# Altium PCB PCB1.PcbDoc
Units mm, origin at the board's own origin, x right, y up, seen from the top; angles counter-clockwise.
Board outline 134.47 x 82.85 mm, 2 copper layers (Top Layer, Bottom Layer); 55 components, 56 nets, 192 pads, 24 vias.
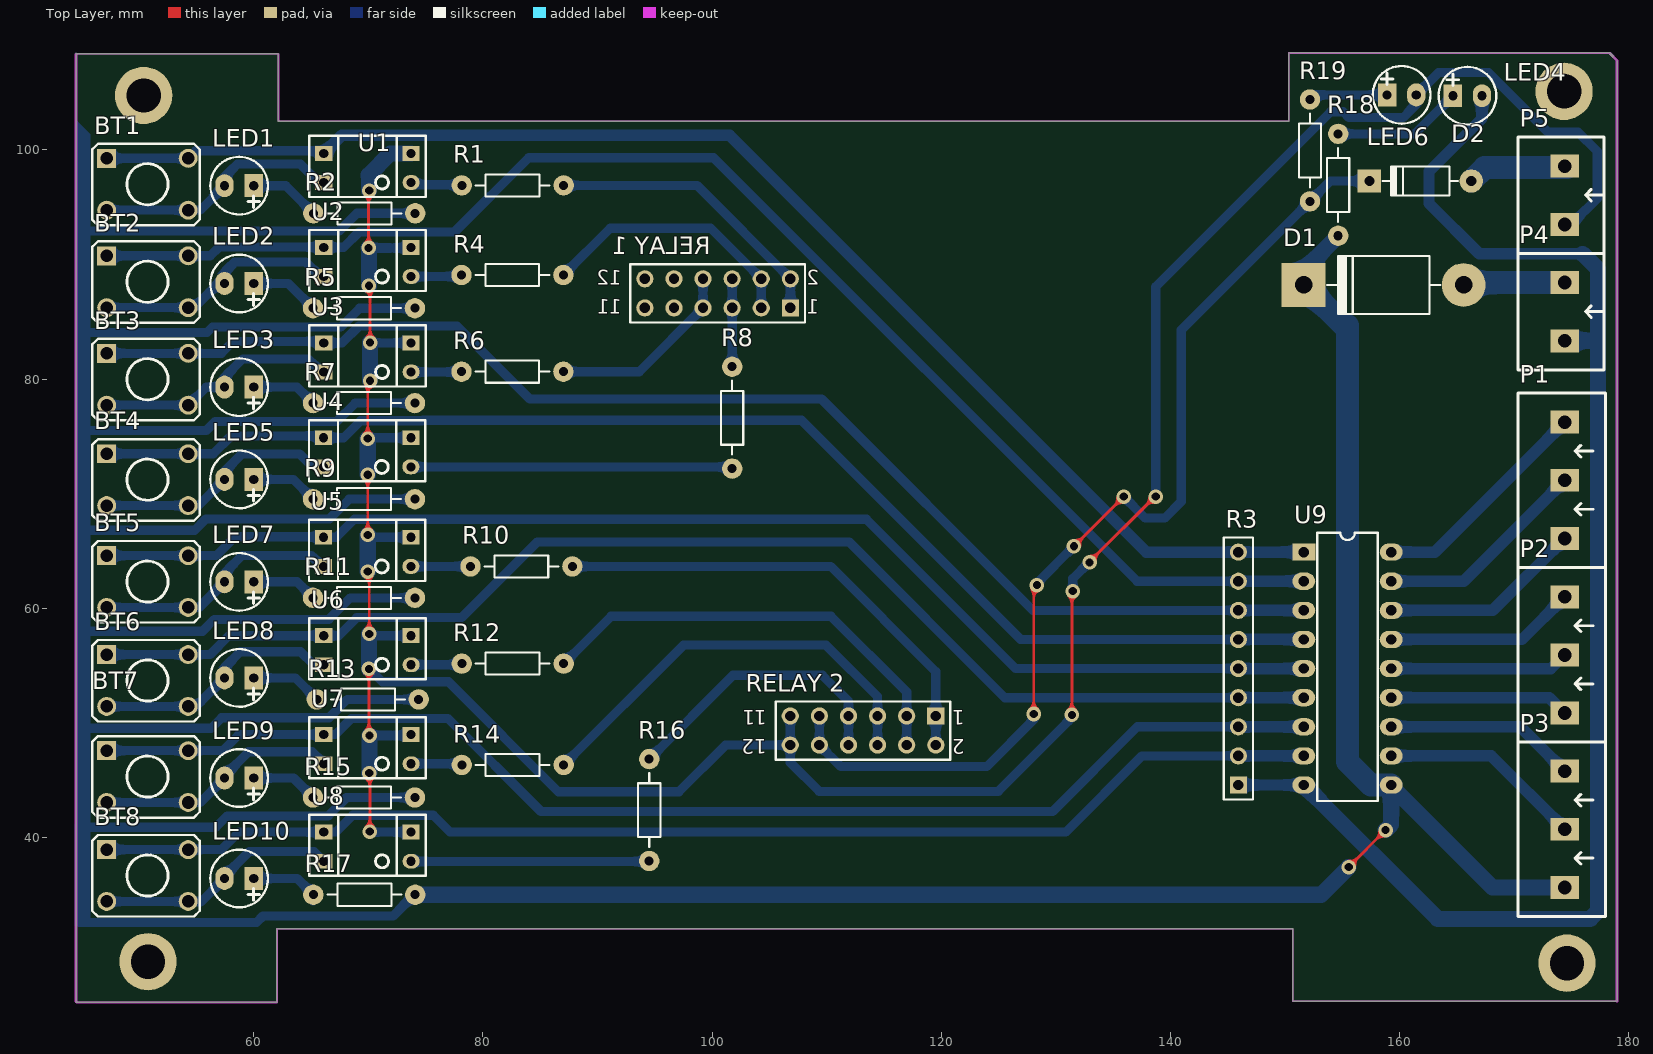
[diagram p0: Top Layer view]
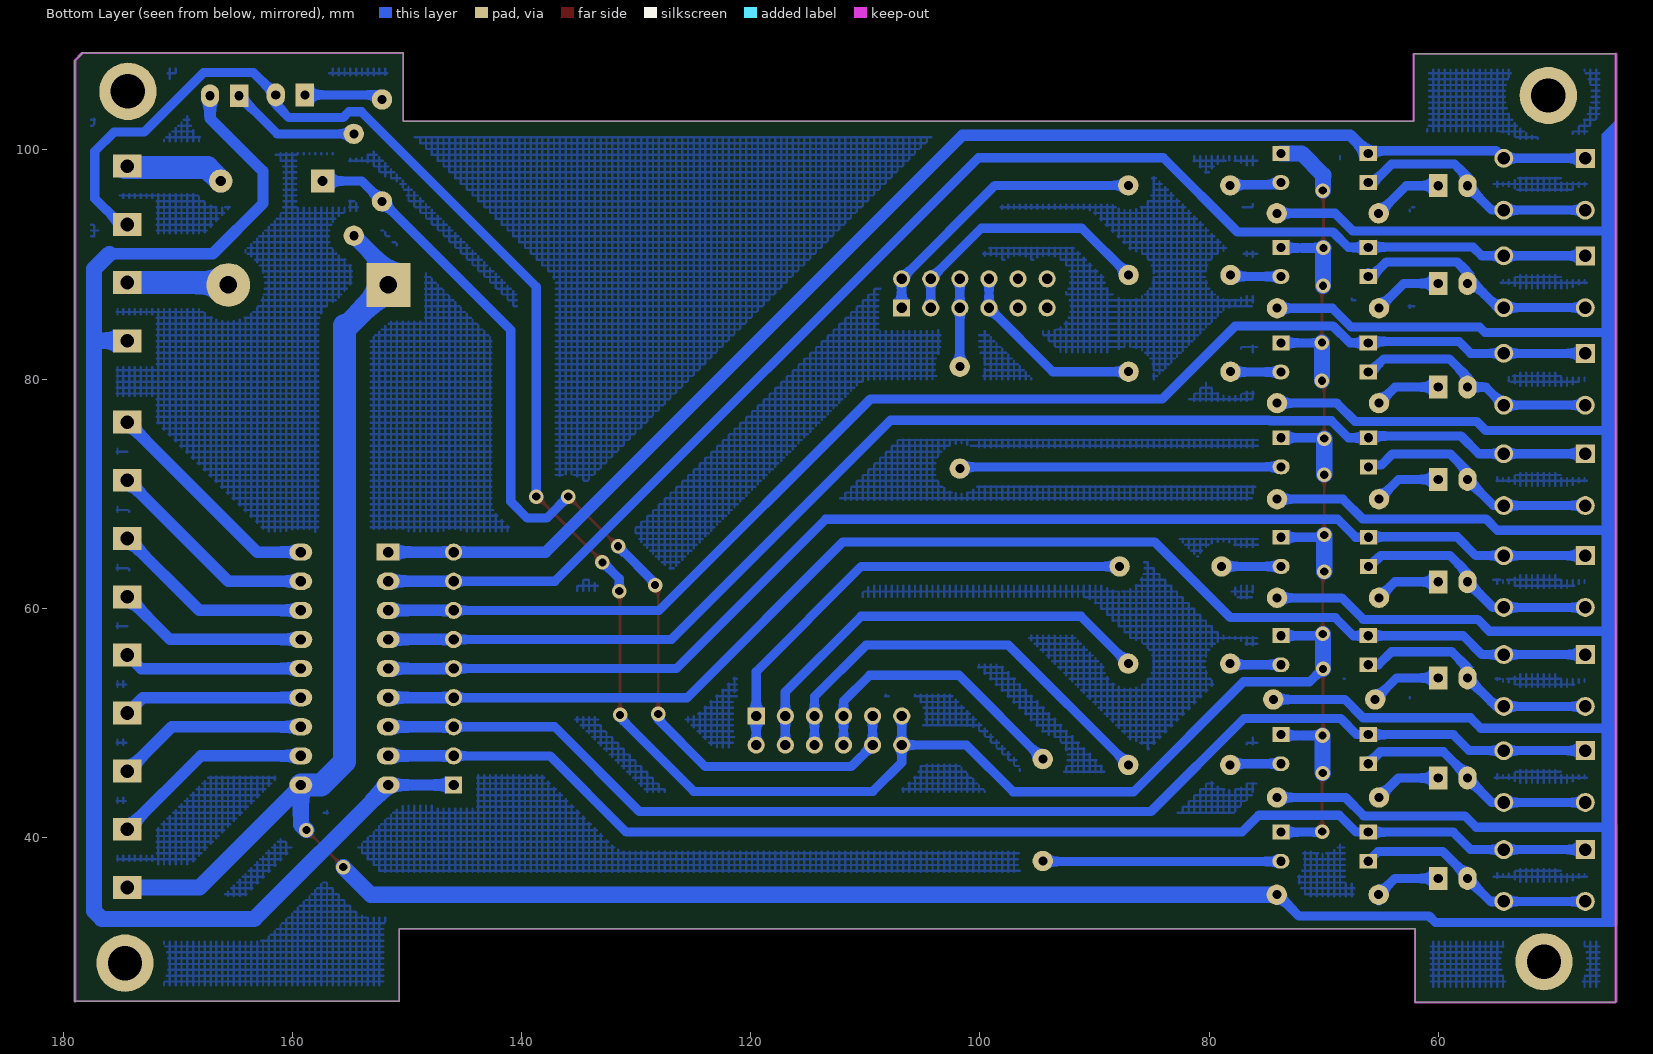
[diagram p1: Bottom Layer view, seen from below]
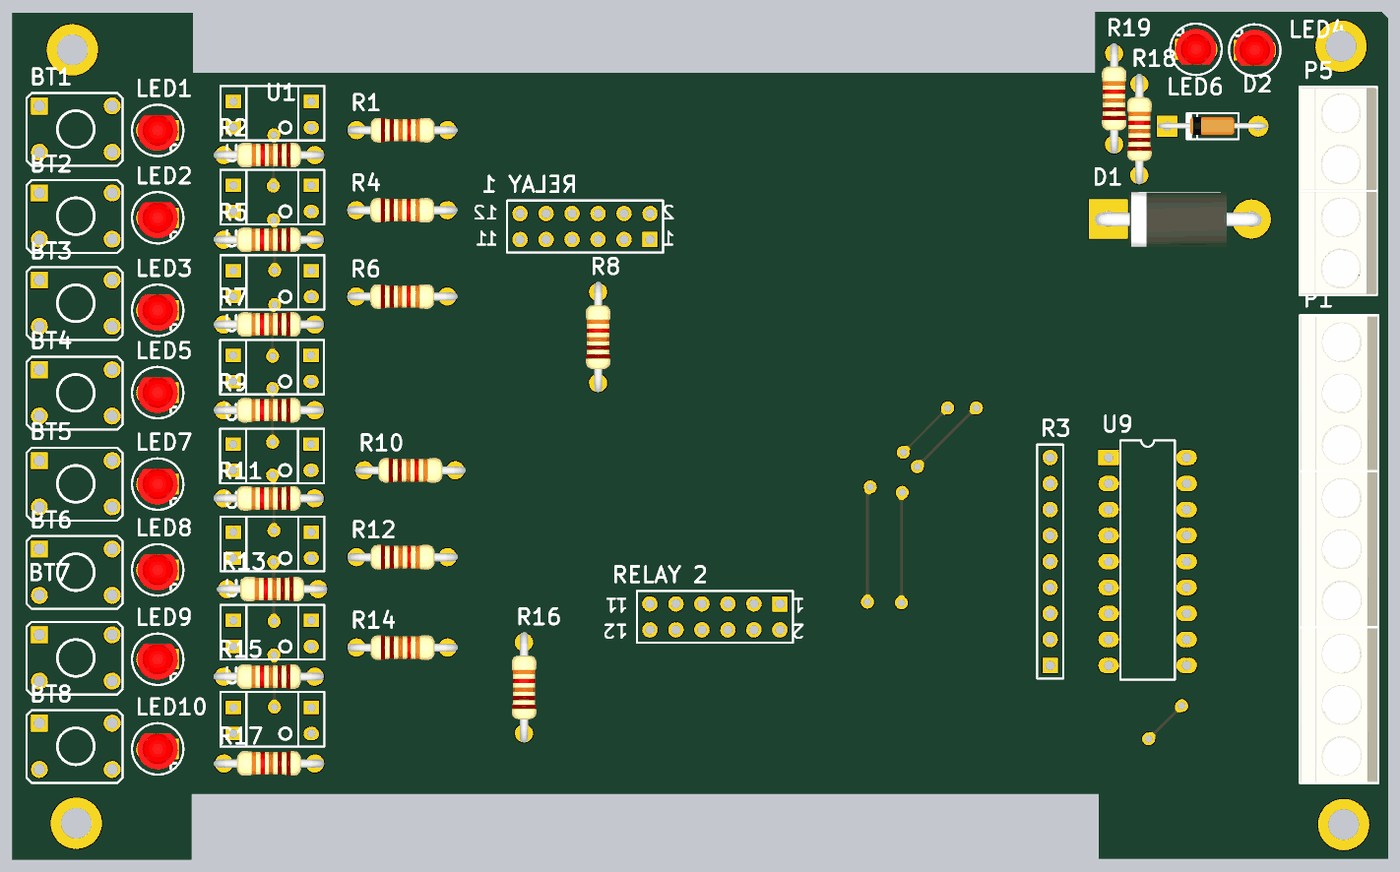
[diagram p2: 3D render of the assembled board from above, using the file's embedded part models]

## Layer stack, top to bottom
Top Layer: signal copper 0.0356
Dielectric: dielectric 0.32, FR-4, Dk 4.8
Bottom Layer: signal copper 0.0356

## Board outline
44.501,25.603 44.501,108.382 62.154,108.382 62.154,102.489 150.317,102.489 150.317,108.458 178.384,108.458 178.384,108.382 178.968,107.798 178.968,25.705 150.673,25.705 150.673,32.029 62.027,32.029 62.027,25.603

## Design rules (kind name [scope] priority, off if disabled: settings)
Clearance [All] p1: gap=1.2
PolygonConnect [All] p1: connectstyle=Relief reliefconductorwidth=0.254 reliefentries=4 polygonreliefangle="90 Angle"
RoomDefinition Sheet1 [InComponentClass('Sheet1')] p1: confinementstyle=ConfineIn formatcopy=TRUE lockcomponents=FALSE outline 0,0 50.8,0 50.8,25.4 0,25.4
RoutingVias [All] p1: holewidth=0.711 width=1.27 viastyle="Through Hole" minholewidth=0.711 minwidth=1.27 maxholewidth=0.711 maxwidth=1.27
SilkscreenOverComponentPads SilkToSolderMaskClearance [IsPad] p1: minsilkscreentomaskgap=0.254
SolderMaskExpansion [All] p1: expansion=0.102
Width [All] p1: maxlimit=2 minlimit=0.254 preferedwidth=1.4 toplayer_maxwidth=0.254 toplayer_prefwidth=0.254 bottomlayer_minwidth=0.8 minimp=50.000000 maximp=50.000000 favimp=50.000000
27 further rules are at their usual default settings.

## Components (designator, comment, footprint, x,y, rotation, side; value= is the part's Value field where it differs from the comment)
BT1 "BUTTON" "button 4 pin" 50.724,97.003 r0 top
BT2 "BUTTON" "button 4 pin" 50.724,88.494 r0 top
BT3 "BUTTON" "button 4 pin" 50.724,79.985 r0 top
BT4 "BUTTON" "button 4 pin" 50.724,71.222 r0 top
BT5 "BUTTON" "button 4 pin" 50.724,62.332 r0 top
BT6 "BUTTON" "button 4 pin" 50.724,53.696 r0 top
BT7 "BUTTON" "button 4 pin" 50.724,45.314 r0 top
BT8 "BUTTON" "button 4 pin" 50.724,36.678 r0 top
D1 "1N5408" D5A 151.613,88.214 r0 top
D2 "1N4007" D1A 166.243,97.282 r0 top
LED1 "LED3" LED3mm 58.725,96.876 r180 top
LED2 "LED3" LED3mm 58.725,88.341 r180 top
LED3 "LED3" LED3mm 58.725,79.299 r180 top
LED4 "LED3" LED3mm 165.913,104.724 r0 top
LED5 "LED3" LED3mm 58.725,71.247 r180 top
LED6 "LED3" LED3mm 160.172,104.8 r0 top
LED7 "LED3" LED3mm 58.725,62.306 r180 top
LED8 "LED3" LED3mm 58.725,53.924 r180 top
LED9 "LED3" LED3mm 58.725,45.187 r180 top
LED10 "LED3" LED3mm 58.725,36.424 r180 top
P1 "Header 3 - M" "Medium - Header 3" 174.396,66.091 r90 top
P2 "Header 3 - M" "Medium - Header 3" 174.396,50.851 r90 top
P3 "Header 3 - M" "Medium - Header 3" 174.396,35.636 r90 top
P4 "Header 2 - M" "Medium - Header 2" 174.396,85.877 r270 top
P5 "Header 2 - M" "Medium - Header 2" 174.396,96.037 r270 top
R1 "220" R1/4W 87.046,96.901 r180 top
R2 "10K" R1/4W 65.202,94.463 r0 top
R3 "RESISTOR SIP 9" HDR1X9 145.923,44.577 r90 top
R4 "220" R1/4W 87.02,89.078 r180 top
R5 "10K" R1/4W 65.176,86.182 r0 top
R6 "220" R1/4W 87.02,80.645 r180 top
R7 "10K" R1/4W 65.176,77.902 r0 top
R8 "220" R1/4W 101.752,81.077 r270 top
R9 "10K" R1/4W 65.176,69.52 r0 top
R10 "220" R1/4W 87.808,63.652 r180 top
R11 "10K" R1/4W 65.176,60.909 r0 top
R12 "220" R1/4W 87.046,55.169 r180 top
R13 "10K" R1/4W 65.507,52.045 r0 top
R14 "220" R1/4W 87.046,46.33 r180 top
R15 "10K" R1/4W 65.176,43.485 r0 top
R16 "220" R1/4W 94.513,46.838 r270 top
R17 "10K" R1/4W 65.202,35.001 r0 top
R18 "10K" R1/4W 154.635,101.397 r270 top
R19 "10K" R1/4W 152.171,104.394 r270 top
"RELAY 1" "Header 6X2" HDR2X6#1 106.83,86.21 r180 top locked
"RELAY 2" "Header 6X2" HDR2X6#2 119.52,50.6 r180 top locked
U1 "Opto 1" DIP4 73.736,97.155 r90 top
U2 "Opto 1" DIP4 73.736,88.951 r90 top
U3 "Opto 1" DIP4 73.736,80.62 r90 top
U4 "Opto 1" DIP4 73.711,72.339 r90 top
U5 "Opto 1" DIP4 73.711,63.652 r90 top
U6 "Opto 1" DIP4 73.736,55.067 r90 top
U7 "Opto 1" DIP4 73.736,46.431 r90 top
U8 "Opto 1" DIP4 73.736,37.922 r90 top
U9 "IC" "DIP 18" 151.638,64.897 r270 top

## Footprints (in the part's own frame and the unit in brackets; to place one, negate y for a bottom-side part, rotate by r counter-clockwise, add the part's x,y. Pads: shape width x height; smd on the part's side, far side on the other; paste and mask are expansions set on the pad)
"button 4 pin" [mil] "BUTTON SMORE 280mil x 178mil"
  rect 65x65 hole 43.31: 1(-140,89)
  round 65 hole 43.31: 1(140,89) 2(-140,-89) 2(140,-89)
  silkscreen extent -190,-141 180,139
D1A [mil] "Diode 1A, W 100mil, L 350mil"
  round 80 hole 35: 1(0,0)
  rect 80x80 hole 35: 2(-350,0)
  silkscreen extent -305,-50 -45,50, body extent -386,-33 34,36, height 84
D5A [mil] "Diode 5A, W 200mil, L 550mil"
  round 150 hole 60: 1(550,0)
  rect 150x150 hole 60: 2(0,0)
  silkscreen extent 80,-100 470,100, body extent -52,-106 590,103, height 254
DIP4 [mm] "W.300/L.400"
  oval 1.3x1.5 hole 0.8: 1(0,0)
  rect 1.3x1.5 hole 0.8: 2(2.54,0) 3(2.54,7.62) 4(0,7.62)
  silkscreen extent -1.27,-1.27 4.06,8.89, body extent -1.27,-1.27 4.06,8.89, height 5
"DIP 18" [mm]
  rect 1.5x2 hole 0.9: 1(0,0)
  oval 1.5x2 hole 0.9: 2(2.54,0) 3(5.08,0) 4(7.62,0) 5(10.16,0) 6(12.7,0) 7(15.24,0) 8(17.78,0) 9(20.32,0) 10(20.32,7.62) 11(17.78,7.62) 12(15.24,7.62) 13(12.7,7.62) 14(10.16,7.62) 15(7.62,7.62) 16(5.08,7.62) 17(2.54,7.62) 18(0,7.62)
  silkscreen extent -1.69,1.16 21.72,6.46
HDR1X9 [mm] "Connector; Header; 9 Position"
  rect 1.5x1.5 hole 0.9: 1(0,0)
  round 1.5 hole 0.9: 2(2.54,0) 3(5.08,0) 4(7.62,0) 5(10.16,0) 6(12.7,0) 7(15.24,0) 8(17.78,0) 9(20.32,0)
  silkscreen extent -1.27,-1.27 21.59,1.27, body extent -1.27,-1.27 21.59,1.27, height 7
HDR2X6#1 [mm] "Connector; Header; 6x2 Position"
  rect 1.5x1.5 hole 0.9: 1(0,0)
  round 1.5 hole 0.9: 2(0,-2.54) 3(2.54,0) 4(2.54,-2.54) 5(5.08,0) 6(5.08,-2.54) 7(7.62,0) 8(7.62,-2.54) 9(10.16,0) 10(10.16,-2.54) 11(12.7,0) 12(12.7,-2.54)
  silkscreen extent -1.27,-3.81 13.97,1.27, body extent -1.27,-3.81 13.97,1.27, height 7
HDR2X6#2 [mm] "Connector; Header; 6x2 Position"
  rect 1.5x1.5 hole 0.9: 1(0,0)
  round 1.5 hole 0.9: 2(0,2.54) 3(2.54,0) 4(2.54,2.54) 5(5.08,0) 6(5.08,2.54) 7(7.62,0) 8(7.62,2.54) 9(10.16,0) 10(10.16,2.54) 11(12.7,0) 12(12.7,2.54)
  silkscreen extent -1.27,-1.27 13.97,3.81, body extent -1.27,-1.27 13.97,3.81, height 7
LED3mm [mm]
  rect 1.6x2 hole 0.8: 1(-1.27,0)
  oval 1.6x2 hole 0.8: 2(1.27,0)
  silkscreen extent -2.52,-2.51 2.51,2.52, body extent -1.99,-1.5 1.99,1.99, height 5.38
"Medium - Header 2" [mm]
  rect 2x2.5 hole 1.2: 1(-2.54,0) 2(2.54,0)
  silkscreen extent -5.08,-4.08 5.08,3.43, body extent -5,-4.07 5,3.43, height 10
"Medium - Header 3" [mm]
  rect 2x2.5 hole 1.2: 1(0,0) 2(5.08,0) 3(10.147,0)
  silkscreen extent -2.54,-3.58 12.7,4.06, body extent -2.42,-3.51 12.58,3.99, height 10
R1/4W [mil] "R 1/4W, 2 Pin, 350mil"
  round 70 hole 31: 1(0,0) 2(350,0)
  silkscreen extent 48,-38 302,38, body extent -40,-47 386,47, height 111

## Part data
BT1 BT2 BT3 BT4 BT5 BT6 BT7 BT8: library part "BUTTON 4 PIN"
D1: library part D5A, "Diode 5A"
D2: library part D1A, "Diode 1A"
LED1 LED2 LED3 LED4 LED5 LED6 LED7 LED8 LED9 LED10: library part "LED 3mm", "LED 3mm"
P1 P2 P3: "Header, 3-Pin, Medium"
P4 P5: "Header, 2-Pin, Medium"
R1 R2 R4 R5 R6 R7 R8 R9 R10 R11 R12 R13 R14 R15 R16 R17 R18 R19: library part R1/4W, "Resistor 1/4W"
"RELAY 1" "RELAY 2": "Header, 6-Pin, Dual row"
U1 U2 U3 U4 U5 U6 U7 U8: "Single"
U9: library part ULN2803

## Free pads (board coordinates)
  round 5 hole 3: 2(50.394,104.75) 2(50.775,29.159) 2(174.346,105.105) 2(174.6,29.032)

## Via types
v1: diameter 1.27, hole 0.711, Top Layer to Bottom Layer, 24 vias

## Nets (pads, with @x,y where several pads share a name; then routed paths per layer and width w, separated by ;. In a path a pad name is that pad's centre, name@x,y a point inside that pad or via, vN(x,y) a via of type N, cw(c..) or ccw(c..) an arc to the next point about the centre after c; other vN are vias at no path point)
1: "RELAY 1.1" "RELAY 1.2" R1.1 | length 25.7
  Bottom Layer w0.8: R1.1 98.679,96.901 106.83,88.75 106.83,86.21
2: "RELAY 1.3" "RELAY 1.4" R4.1 | length 23.3
  Bottom Layer w0.8: R4.1 91.11,93.167 99.873,93.167 104.29,88.75 104.29,86.21
3: "RELAY 1.7" "RELAY 1.8" R6.1 | length 17
  Bottom Layer w0.8: R6.1 93.645,80.645 99.21,86.21 99.21,88.75
4: "RELAY 1.5" "RELAY 1.6" R8.1 | length 7.7
  Bottom Layer w0.8: 101.75,88.75 101.752,88.748 R8.1
5: "RELAY 2.1" "RELAY 2.2" R10.1 | length 41.9
  Bottom Layer w0.8: R10.1 110.338,63.652 119.52,54.47 119.52,50.6 119.52,48.06
5v: "RELAY 2.9" "RELAY 2.10" D2.2 R19.2 | length 89.6
  Top Layer w0.254: v1(128.067,50.775) 128.067,61.747 v1(128.346,62.027) ; v1(131.572,65.405) v1(135.915,69.748)
  Bottom Layer w0.8: 109.36,50.6 109.36,48.06 111.243,46.177 123.952,46.177 128.067,50.292 v1(128.067,50.775) ; v1(128.346,62.027) 128.346,62.179 v1(131.572,65.405) ; v1(135.915,69.748) 137.795,67.869 139.497,67.869 140.945,69.317 140.945,84.277 R19.2 153.949,97.282 D2.2
6: "RELAY 2.3" "RELAY 2.4" R12.1 | length 39
  Bottom Layer w0.8: R12.1 91.186,59.309 110.363,59.309 116.98,52.692 116.98,50.6 116.98,48.06
7: "RELAY 2.5" "RELAY 2.6" R14.1 | length 37.8
  Bottom Layer w0.8: R14.1 97.511,56.794 109.931,56.794 114.44,52.286 114.44,50.6 114.44,48.06
8: "RELAY 2.7" "RELAY 2.8" R16.1 | length 25.2
  Bottom Layer w0.8: R16.1 101.829,54.153 109.626,54.153 111.9,51.879 111.9,50.6 111.9,48.06
24V: D1.2 P3.1 R2.2 R5.2 R7.2 R9.2 R11.2 R13.2 R15.2 R17.2 R18.2 U9.10 | length 402.7
  Top Layer w0.254: v1(155.55,37.414) v1(158.775,40.64)
  Bottom Layer w0.8: 44.806,32.588 60.249,32.588 60.808,33.147 72.161,33.147 R17.2@74.016,35.001 ; 45.136,57.988 55.524,57.988 56.566,59.03 66.548,59.03 68.428,60.909 R11.2 ; 45.282,40.894 56.693,40.894 57.683,41.885 66.497,41.885 68.097,43.485 R15.2 ; 45.282,75.54 45.307,75.514 55.855,75.514 56.642,76.302 67.259,76.302 68.859,77.902 R7.2 ; 45.282,84.176 45.383,84.074 55.931,84.074 56.388,84.531 67.589,84.531 69.24,86.182 R5.2 ; 45.282,92.786 45.415,92.92 67.469,92.92 69.012,94.463 R2.2 ; 45.358,66.802 54.839,66.802 55.829,67.793 66.599,67.793 68.326,69.52 R9.2 ; 45.383,49.53 56.286,49.53 57.201,50.444 66.573,50.444 68.174,52.045 R13.2
  Bottom Layer w1.4: R17.2@74.016,35.001 R17.2 153.137,35.001 v1(155.55,37.414) ; D1.2 151.613,89.484 R18.2 ; v1(158.775,40.64) 159.258,41.123 U9.10@159.258,44.467 ; U9.10 U9.10@159.258,44.467 ; P3.1 168.089,35.636 U9.10@159.258,44.467
  Bottom Layer w2: D1.2 155.169,84.658 155.448,84.658 155.448,46.609 157.48,44.577 U9.10
"GND 5V": "RELAY 2.11" "RELAY 2.12" LED6.2 P5.2 U1.2 U2.2 U3.2 U4.2 U5.2 U6.2 U7.2 U8.2 | length 264.5
  Top Layer w0.254: v1(69.952,63.195) 70.079,63.068 v1(70.079,57.76) ; v1(69.952,66.396) 69.926,66.421 69.952,66.446 v1(69.952,71.653) ; v1(69.952,74.803) 69.952,80.162 70.155,79.959 v1(70.155,79.858) ; v1(70.028,91.44) 70.028,96.393 v1(70.079,96.444) ; v1(70.053,54.712) 70.053,48.946 v1(70.104,48.895) ; v1(70.053,88.138) 70.053,88.417 70.155,88.519 v1(70.155,83.185) ; v1(70.079,45.618) 70.079,46.076 70.129,46.126 v1(70.129,40.513) ; v1(131.394,50.698) 131.394,61.417 v1(131.47,61.493) ; v1(132.944,64.008) 132.944,64.059 138.709,69.825 v1(138.709,69.748)
  Bottom Layer w0.8: v1(69.952,66.396) 70.155,66.192 U5.2 ; v1(69.952,74.803) 70.028,74.879 U4.2 ; v1(70.028,91.44) 73.685,91.44 U2.2 ; v1(70.053,54.712) 70.104,54.712 71.228,53.588 76.994,53.588 86.589,43.993 97.104,43.993 101.171,48.06 106.82,48.06 ; v1(70.079,57.76) 70.231,57.607 U6.2 ; v1(70.104,48.895) 73.66,48.895 U7.2 ; v1(70.129,40.513) 70.18,40.462 U8.2 ; v1(70.155,83.185) 70.18,83.16 U3.2 ; 106.82,50.6 106.82,48.06 ; v1(131.394,50.698) 131.394,50.444 124.968,44.018 109.347,44.018 106.82,46.545 106.82,48.06 ; v1(131.47,61.493) 131.47,62.586 132.893,64.008 v1(132.944,64.008) ; v1(138.709,69.748) 138.709,88.062 153.975,103.327 155.067,103.327 155.575,102.819 160.299,102.819 161.442,103.962 LED6.2 163.398,106.756 167.742,106.756 172.949,101.549 175.565,101.549 177.241,99.873 177.241,95.758 174.981,93.497 P5.2
  Bottom Layer w1.4: v1(69.952,63.195) v1(69.952,66.396) ; v1(69.952,71.653) v1(69.952,74.803) ; v1(70.028,91.44) 70.053,91.415 v1(70.053,88.138) ; v1(70.053,54.712) 70.079,54.737 v1(70.079,57.76) ; v1(70.079,45.618) 70.104,45.644 v1(70.104,48.895) ; v1(70.079,96.444) 70.079,97.638 70.002,97.714 70.053,97.765 70.028,97.79 71.933,99.695 U1.2 ; v1(70.155,79.858) v1(70.155,83.185)
"GND 24": LED4.2 P4.2 R3.1 U9.9 | length 123.7
  Bottom Layer w1: R3.1 U9.9 ; LED4.2 167.183,102.743 162.56,98.12 162.56,95.326 166.954,90.932 175.971,90.932
  Bottom Layer w1.4: U9.9 163.322,32.893 176.632,32.893 177.303,33.565 177.303,38.76 ; P4.2 177.303,83.337 ; 175.971,90.932 177.317,89.586 177.317,38.938
I1: BT1.1 R3.9 U1.3 U9.1 | length 120.7
  Bottom Layer w0.8: BT1.1@47.168,99.263 54.28,99.263 54.94,99.924 65.634,99.924 U1.3@66.116,99.441
  Bottom Layer w1: U1.3 67.691,101.27 101.524,101.27 137.897,64.897 R3.9 U9.1
I2: BT2.1 R3.8 U2.3 U9.2 | length 123
  Bottom Layer w0.8: BT2.1@47.168,90.754 54.28,90.754 56.21,90.754 56.972,91.516 U2.3@65.811,91.516 ; U2.3 67.843,91.491 69.19,92.837 77.521,92.837 83.998,99.314 100.127,99.314 137.084,62.357 R3.8
  Bottom Layer w1: R3.8 U9.2
I3: BT3.1 R3.7 U3.3 U9.3 | length 115.8
  Bottom Layer w0.8: BT3.1@47.168,82.245 54.28,82.245 57.175,82.245 58.217,83.287 U3.3@66.116,83.287 ; U3.3 67.708,83.16 69.182,84.633 77.724,84.633 84.099,78.257 109.55,78.257 127.991,59.817 R3.7
  Bottom Layer w1: R3.7 U9.3
I4: BT4.1 R3.6 U4.3 U9.4 | length 113.7
  Bottom Layer w0.8: BT4.1@47.168,73.482 54.28,73.482 56.464,73.482 58.014,75.032 U4.3@66.116,75.032 ; U4.3 67.843,74.879 69.323,76.359 74.706,76.359 74.75,76.403 107.798,76.403 126.924,57.277 R3.6
  Bottom Layer w1: R3.6 U9.4
I5: BT5.1 R3.5 U5.3 U9.5 | length 110.8
  Bottom Layer w0.8: BT5.1@47.168,64.592 54.28,64.592 56.718,64.592 58.369,66.243 U5.3@65.71,66.243 ; U5.3 67.208,66.192 68.783,67.767 113.462,67.767 126.492,54.737 R3.5
  Bottom Layer w1: R3.5 U9.5
I6: BT6.1 R3.4 U6.3 U9.6 | length 114.2
  Bottom Layer w0.8: BT6.1@47.168,55.956 54.28,55.956 56.185,55.956 57.836,57.607 U6.3 67.412,57.607 68.986,59.182 78.13,59.182 84.734,65.786 111.963,65.786 125.552,52.197 R3.4
  Bottom Layer w1: R3.4 U9.6
I7: BT7.1 R3.3 U7.3 U9.7 | length 112.1
  Bottom Layer w0.8: BT7.1@47.168,47.574 54.28,47.574 57.302,47.574 58.699,48.971 U7.3 67.107,48.971 68.529,50.394 76.937,50.394 85.065,42.266 129.718,42.266 137.109,49.657 R3.3
  Bottom Layer w1: R3.3 U9.7
I8: BT8.1 R3.2 U8.3 U9.8 | length 109.1
  Bottom Layer w0.8: BT8.1@47.168,38.938 54.28,38.938 57.175,38.938 58.699,40.462 U8.3 67.158,40.462 68.637,41.942 75.66,41.942 77.14,40.462 130.861,40.462 137.516,47.117 R3.2
  Bottom Layer w1: R3.2 U9.8
NetBT1_2: BT1.2 LED1.2 U1.4 | length 22
  Bottom Layer w0.8: BT1.2@47.168,94.742 54.28,94.742 55.321,94.742 LED1.2 57.455,97.638 58.572,98.755 64.084,98.755 65.684,97.155 U1.4 ; U1.4@65.837,96.901 U1.4@66.116,96.901
NetBT2_2: BT2.2 LED2.2 U2.4 | length 21.8
  Bottom Layer w0.8: BT2.2@47.168,86.233 54.28,86.233 54.788,86.233 56.896,88.341 LED2.2 57.455,89.332 58.344,90.221 64.541,90.221 65.799,88.963 U2.4@66.116,89.281
NetBT3_2: BT3.2 LED3.2 U3.4 | length 21.5
  Bottom Layer w0.8: BT3.2@47.168,77.724 54.28,77.724 55.855,79.299 LED3.2 57.455,80.162 59.055,81.763 64.745,81.763 65.761,80.747 U3.4@66.116,80.747
NetBT4_2: BT4.2 LED5.2 U4.4 | length 21.6
  Bottom Layer w0.8: BT4.2@47.168,68.961 54.28,68.961 55.169,68.961 LED5.2 57.455,71.958 58.953,73.457 64.008,73.457 64.973,72.492 U4.4@66.116,72.492
NetBT5_2: BT5.2 LED7.2 U5.4 | length 21.7
  Bottom Layer w0.8: BT5.2@47.168,60.071 54.28,60.071 55.22,60.071 LED7.2 57.455,63.068 59.004,64.618 65.024,64.618 65.989,63.652 U5.4
NetBT6_2: BT6.2 LED8.2 U6.4 | length 21.9
  Bottom Layer w0.8: BT6.2@47.168,51.435 54.28,51.435 54.966,51.435 LED8.2 57.455,54.839 58.826,56.21 64.084,56.21 65.227,55.067 U6.4
NetBT7_2: BT7.2 LED9.2 U7.4 | length 21.3
  Bottom Layer w0.8: BT7.2@47.168,43.053 54.28,43.053 55.321,43.053 LED9.2 57.455,45.371 59.556,47.473 65.075,47.473 U7.4
NetBT8_2: BT8.2 LED10.2 U8.4 | length 21.2
  Bottom Layer w0.8: BT8.2@47.168,34.417 54.28,34.417 55.448,34.417 LED10.2 57.455,36.608 59.632,38.786 65.253,38.786 U8.4
NetD1_1: D1.1 P4.1 | length 8.6
  Bottom Layer w2: D1.1@166.137,87.66 166.895,88.417 P4.1
NetD2_1: D2.1 P5.1 | length 8.9
  Bottom Layer w2: D2.1 167.411,98.45 P5.1@174.625,98.45
NetLED1_1: LED1.1 R2.1 | length 6.2
  Bottom Layer w0.8: LED1.1 62.789,96.876 R2.1
NetLED2_1: LED2.1 R5.1 | length 6.1
  Bottom Layer w0.8: LED2.1 63.017,88.341 R5.1
NetLED3_1: LED3.1 R7.1 | length 5.8
  Bottom Layer w0.8: LED3.1 63.779,79.299 R7.1
NetLED4_1: LED4.1 R18.1 | length 11.4
  Bottom Layer w0.8: R18.1 161.315,101.397 LED4.1
NetLED5_1: LED5.1 R9.1 | length 5.9
  Bottom Layer w0.8: LED5.1 63.449,71.247 R9.1
NetLED6_1: LED6.1 R19.1 | length 7.2
  Bottom Layer w0.8: R19.1 152.578,104.8 LED6.1 LED6.1@158.674,104.572
NetLED7_1: LED7.1 R11.1 | length 5.8
  Bottom Layer w0.8: LED7.1 63.779,62.306 R11.1
NetLED8_1: LED8.1 R13.1 | length 6.3
  Bottom Layer w0.8: LED8.1 63.627,53.924 R13.1
NetLED9_1: LED9.1 R15.1 | length 5.9
  Bottom Layer w0.8: LED9.1 63.475,45.187 R15.1
NetLED10_1: LED10.1 R17.1 | length 6.3
  Bottom Layer w0.8: LED10.1 63.779,36.424 65.176,35.027 R17.1@65.176,34.468
NetP1_1: P1.1 U9.16 | length 17.7
  Bottom Layer w1: U9.16 168.123,59.817 P1.1
NetP1_2: P1.2 U9.17 | length 18.8
  Bottom Layer w1: U9.17 165.583,62.357 P1.2
NetP1_3: P1.3 U9.18 | length 19.8
  Bottom Layer w1: U9.18 163.055,64.897 P1.3
NetP2_1: P2.1 U9.13 | length 15.7
  Bottom Layer w1: U9.13 173.05,52.197 P2.1
NetP2_2: P2.2 U9.14 | length 15.6
  Bottom Layer w1: U9.14 173.203,54.737 P2.2
NetP2_3: P2.3 U9.15 | length 16.7
  Bottom Layer w1: U9.15 170.675,57.277 P2.3
NetP3_2: P3.2 U9.11 | length 17.8
  Bottom Layer w1: U9.11 167.996,47.117 P3.2
NetP3_3: P3.3 U9.12 | length 16.7
  Bottom Layer w1: U9.12 170.523,49.657 P3.3
NetR1_2: R1.2 U1.1 | length 4.4
  Bottom Layer w0.8: U1.1@73.736,96.952 78.105,96.952 R1.2
NetR4_2: R4.2 U2.1 | length 4.4
  Bottom Layer w0.8: U2.1 78.003,88.951 R4.2
NetR6_2: R6.2 U3.1 | length 4.5
  Bottom Layer w0.8: U3.1 77.978,80.62 R6.2@78.156,80.797
NetR8_2: R8.2 U4.1 | length 28.1
  Bottom Layer w0.8: U4.1 101.625,72.339 R8.2@101.752,72.466
NetR10_2: R10.2 U5.1 | length 4.5
  Bottom Layer w0.8: U5.1 78.054,63.652 R10.2@78.13,63.576
NetR12_2: R12.2 U6.1 | length 4.5
  Bottom Layer w0.8: U6.1 78.054,55.067 R12.2
NetR14_2: R14.2 U7.1 | length 4.5
  Bottom Layer w0.8: U7.1 78.054,46.431 R14.2
NetR16_2: R16.2 U8.1 | length 20.8
  Bottom Layer w0.8: U8.1 73.762,37.897 94.463,37.897 R16.2
pads on no net: "RELAY 1.9" "RELAY 1.10" "RELAY 1.11" "RELAY 1.12"

## Polygon pours and split planes (outlines as drawn)
no net on Bottom Layer "Bottom Layer-No Net" (hatched 90Degree grid 0.508 track 0.203, remove dead copper, pour order 3): 178.968,25.705 150.673,25.705 150.673,30.582 150.266,30.988 150.673,31.394 150.673,32.029 62.027,32.029 62.027,25.603 44.399,25.603 44.247,25.756 44.501,26.01 44.501,108.026 61.874,108.026 62.103,107.798 62.154,107.747 62.154,102.489 150.089,102.489 150.495,102.895 150.597,102.997 150.597,108.687 178.079,108.687 178.968,107.798

## Keep-outs
Keep-Out Layer:
  lines w0.15: 44.501,25.705 44.501,25.603 62.027,25.603 62.027,32.029 150.673,32.029 150.673,25.705 178.968,25.705 ; 44.501,108.382 62.154,108.382 62.154,107.594 62.154,102.489 150.317,102.489 150.317,104.115 150.317,108.458 178.384,108.458 178.384,108.382
  lines w0.254: 44.501,25.705 44.501,108.382 ; 178.384,108.382 178.968,107.798 178.968,25.705

## Other copper
Bottom Layer:
  region net 24V: 44.552,102.54 45.72,101.371 45.72,32.893 45.187,32.36 44.399,32.36

## Text inside footprints (layer, text, board x,y; h text height)
"RELAY 1": Top Overlay "12" at 92.098,88.242 h1.27; Top Overlay "1" at 91.082,85.702 h1.27; Top Overlay "1" at 92.098,85.702 h1.27; Top Overlay "1" at 109.37,85.702 h1.27; Top Overlay "2" at 109.37,88.242 h1.27
"RELAY 2": Top Overlay "12" at 104.788,48.568 h1.27 r180; Top Overlay "1" at 103.772,51.108 h1.27 r180; Top Overlay "1" at 104.788,51.108 h1.27 r180; Top Overlay "1" at 122.06,51.108 h1.27 r180; Top Overlay "2" at 122.06,48.568 h1.27 r180